# Altium PCB KV10BLDCControl.PcbDoc
Units mm, origin at the board's own origin, x right, y up, seen from the top; angles counter-clockwise.
Board outline 34.21 x 11.89 mm, 4 copper layers (Top Layer, GND, Signal Layer 1, Bottom Layer), stack 0.778 mm thick; 50 components, 52 nets, 240 pads, 164 vias.
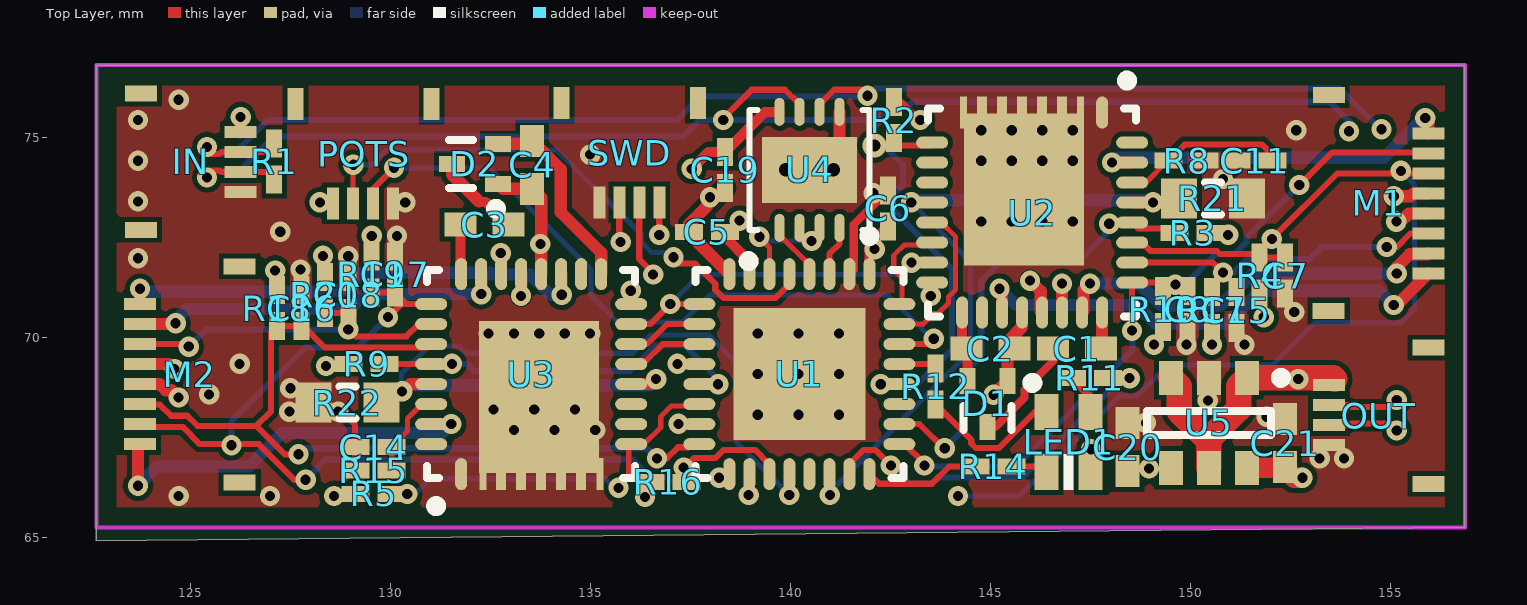
[diagram p0: Top Layer view]
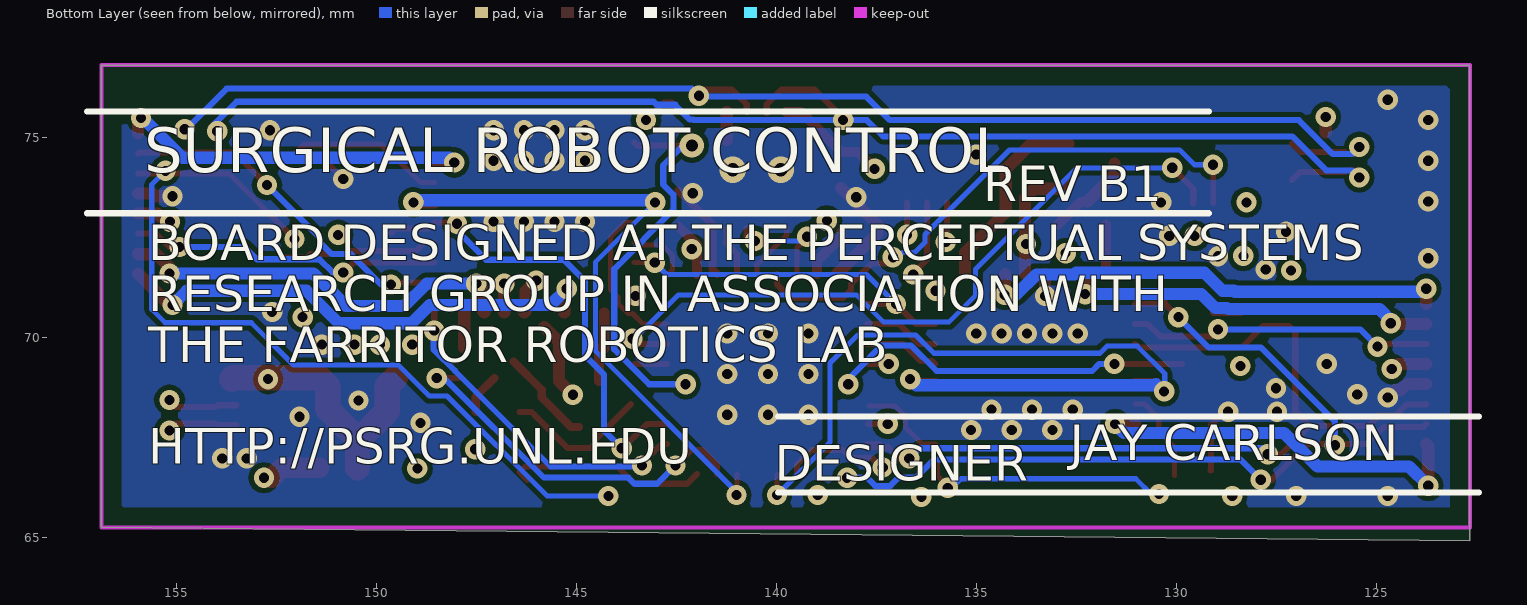
[diagram p1: Bottom Layer view, seen from below]
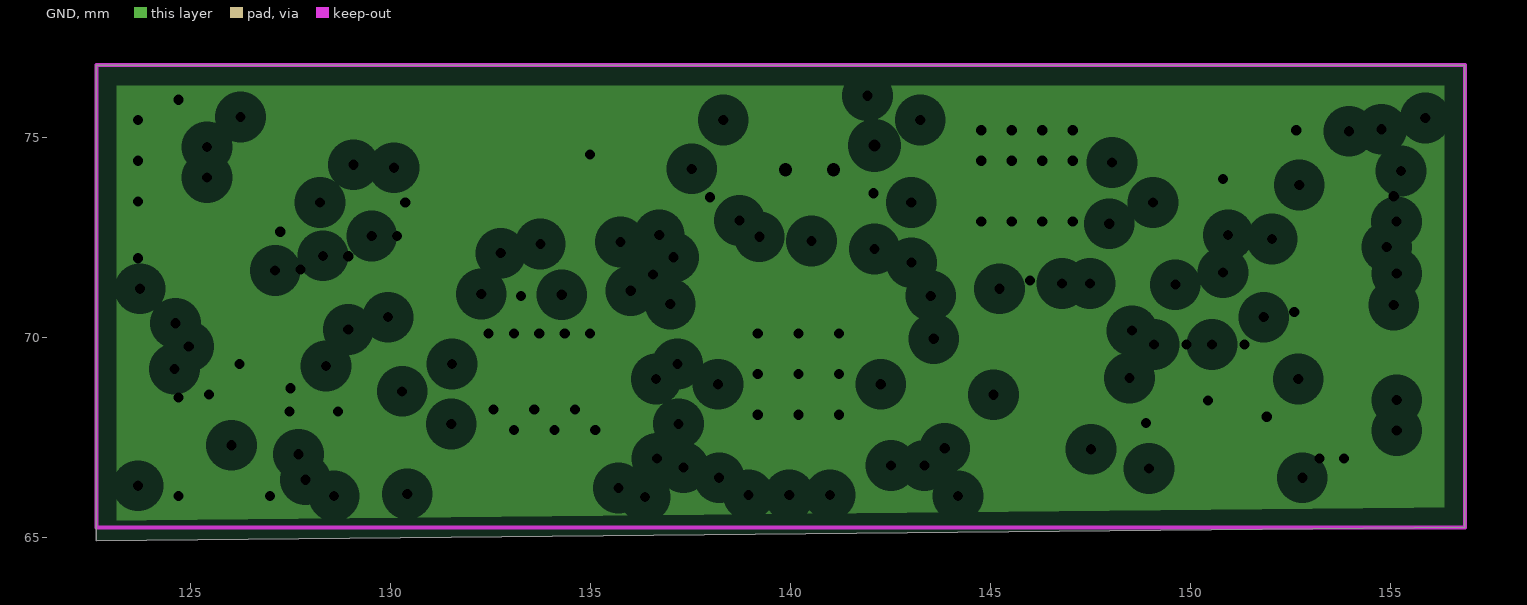
[diagram p2: GND, clearances drawn from the general rule]
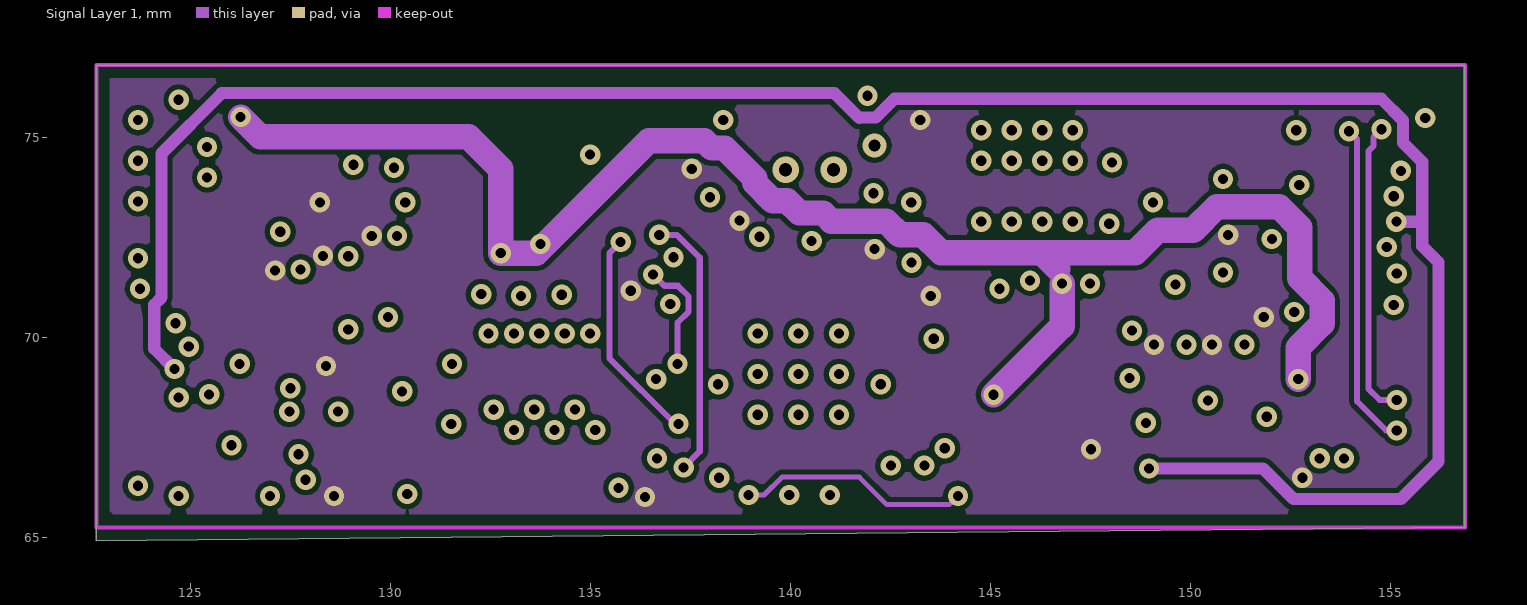
[diagram p3: Signal Layer 1]
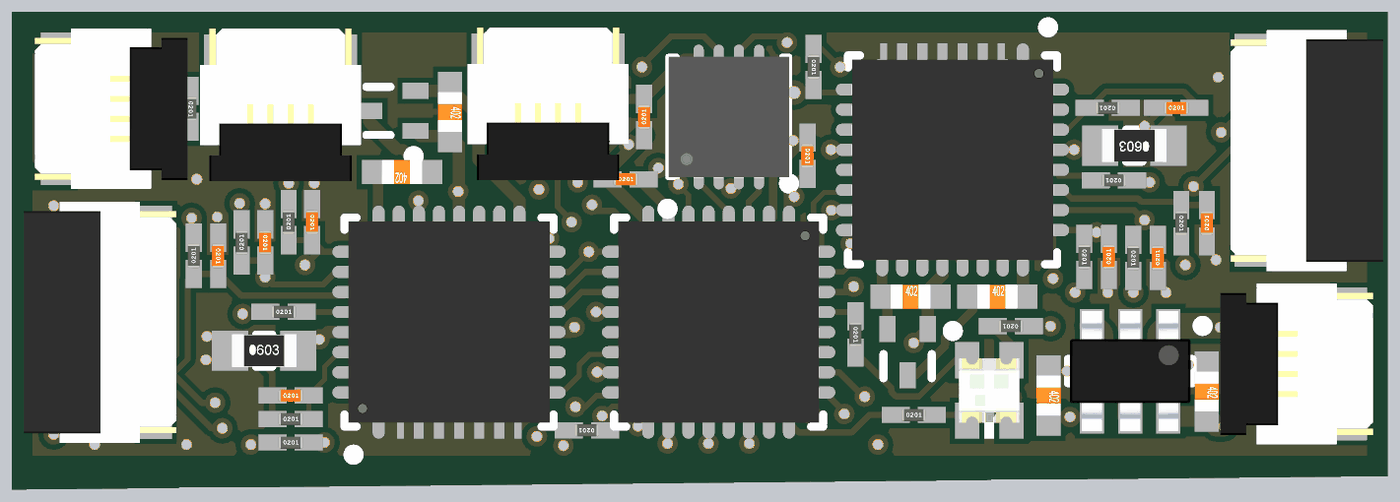
[diagram p4: 3D render of the assembled board from above, using the file's embedded part models]

## Layer stack, top to bottom
Top Solder: solder mask 0.0102, Solder Resist, Dk 3.5
Top Layer: signal copper 0.0356
Dielectric1: core 0.254, FR-4, Dk 4.2
GND: plane copper 0.036, net GND
Dielectric3: prepreg 0.127, Dk 4.2
Signal Layer 1: signal copper 0.036
Dielectric2: core 0.254, Dk 4.2
Bottom Layer: signal copper 0.0356
Bottom Solder: solder mask 0.0102, Solder Resist, Dk 3.5

## Board outline
122.657,76.81 156.87,76.81 156.87,65.253 122.657,64.919

## Design rules (kind name [scope] priority, off if disabled: settings)
Clearance [All] p1: gap=0.127
ComponentClearance [All] p1: gap=0 collisioncheckmode=3 verticalgap=0 showdistances=FALSE
DiffPairsRouting [All] p1: maxlimit=0.254 minlimit=0.254 mostfreqgap=0.254 toplayer_minwidth=0.127 toplayer_maxwidth=0.381 toplayer_prefwidth=0.381 midlayer1_minwidth=0.127 midlayer1_maxwidth=0.381 midlayer1_prefwidth=0.381 bottomlayer_minwidth=0.127 bottomlayer_maxwidth=0.381 bottomlayer_prefwidth=0.381 maxuncoupledlength=12.7
PlaneClearance [All] p1: clearance=0.508
PlaneConnect [All] p1: planeconnectstyle=Direct reliefexpansion=0.508 reliefentries=4 reliefconductorwidth=0.254 reliefairgap=0.254
PolygonConnect [All] p1: connectstyle=Direct reliefconductorwidth=0.254 reliefentries=4 polygonreliefangle="90 Angle" airgapwidth=0.254
RoutingVias [All] p1: holewidth=0.254 width=0.508 viastyle="Through Hole" minholewidth=0.254 minwidth=0.508 maxholewidth=0.711 maxwidth=1.27
SolderMaskExpansion [All] p1: expansion=0
Width [All] p1: maxlimit=5.08 minlimit=0.127 preferedwidth=0.127
25 further rules are at their usual default settings.

## Classes and differential pairs
differential pair COM: +COM_P -COM_N

## Components (designator, comment, footprint, x,y, rotation, side; value= is the part's Value field where it differs from the comment)
C1 "10n" CAPC1005N 147.168,69.723 r0 top
C2 "220n" CAPC1005N 145.009,69.723 r0 top
C3 "10n" CAPC1005N 132.359,72.822 r180 top
C4 "220n" CAPC1005N 133.553,74.32 r270 top
C5 "100n" CAPC0603N 137.922,72.644 r0 top
C6 "100n" CAPC0603N 142.443,73.228 r270 top
C7 "10n" CAPC0603N 152.375,71.552 r90 top
C8 "10n" CAPC0603N 149.936,70.714 r90 top
C11 "1n" CAPC0603N 151.613,74.422 r0 top
C14 "1n" CAPC0603N 129.591,67.259 r0 top
C15 "10n" CAPC0603N 151.155,70.688 r90 top
C16 "10n" CAPC0603N 127.787,70.739 r270 top
C17 "10n" CAPC0603N 130.124,71.577 r270 top
C18 "10n" CAPC0603N 128.956,71.069 r270 top
C19 "100n" CAPC0603N 138.379,74.193 r90 top
C20 "1u" CAPC1005N 148.438,67.259 r270 top
C21 "1u" CAPC1005N 152.375,67.361 r270 top
D1 "BAV99T" "SOT-523 (SC-75)" 144.932,67.767 r180 top
D2 "BAV99T" "SOT-523 (SC-75)" 131.547,74.346 r90 top
IN "FH34S-4S-0.5SH(50)" FH34S-4S-0.5SH(50) 126.263,73.635 r270 top
LED1 "HSMF-C114" HSMF-C114 146.914,67.386 r90 top
M1 "FH34S-8S-0.5SH(50)" FH34S-8S-0.5SH(50) 155.956,71.603 r270 top
M2 "FH34S-8S-0.5SH(50)" FH34S-8S-0.5SH(50) 123.749,70.841 r90 top
OUT "FH34S-4S-0.5SH(50)" FH34S-4S-0.5SH(50) 153.472,68.809 r90 top
POTS "FH34S-4S-0.5SH(50)" FH34S-4S-0.5SH(50) 128.575,73.355 r180 top
R1 "120R (DNI)" RESC0603N 127.102,74.397 r270 top
R2 "10k" RESC0603N 142.596,75.438 r270 top
R3 "10k" RESC0603N 150.063,72.619 r180 top
R4 "10k" RESC0603N 151.74,71.552 r270 top
R5 "10k" RESC0603N 129.591,66.091 r0 top
R8 "33k" RESC0603N 149.911,74.422 r180 top
R9 "10k" RESC0603N 129.413,69.342 r0 top
R10 "10k" RESC0603N 149.327,70.714 r270 top
R11 "100R" RESC0603N 147.498,68.986 r180 top
R12 "100R" RESC0603N 143.637,68.783 r270 top
R14 "100R" RESC0603N 145.085,66.777 r0 top
R15 "33k" RESC0603N 129.591,66.675 r0 top
R16 "10k" RESC0603N 136.957,66.396 r180 top
R17 "10k" RESC0603N 150.546,70.688 r270 top
R18 "10k" RESC0603N 127.178,70.739 r90 top
R19 "10k" RESC0603N 129.54,71.577 r90 top
R20 "10k" RESC0603N 128.372,71.069 r90 top
R21 "0R25 1%" RESC1608N 150.571,73.482 r180 top
R22 "0R25 1%" RESC1608N 128.93,68.377 r0 top
SWD "FH34S-4S-0.5SH(50)" FH34S-4S-0.5SH(50) 135.23,73.381 r180 top
U1 "MKV10Z32VFM7" QFN50P500X500-32V2N 140.233,69.088 r270 top
U2 "L6229Q" L6229Q 146.05,73.127 r270 top
U3 "L6229Q" L6229Q 133.528,69.088 r90 top
U4 "LTC2850CDD#PBF" DFN50P300X300X75-8N 140.487,74.193 r90 top
U5 "MIC5211-LXYM6 TR" SOT26A-6AN 150.47,67.869 r270 top

## Footprints (in the part's own frame and the unit in brackets; to place one, negate y for a bottom-side part, rotate by r counter-clockwise, add the part's x,y. Pads: shape width x height; smd on the part's side, far side on the other; paste and mask are expansions set on the pad)
CAPC0603N [mm] "Chip Capacitor (0201) Body 0.6x0.3mm, IPC Medium Density"
  rect 0.7x0.4 smd: 1(-0.45,0) 2(0.45,0)
  body extent -0.3,-0.15 0.3,0.15, height 0.3
CAPC1005N [mm] "Chip Capacitor (0402), Body 1.0x0.5mm, IPC Medium Density"
  rect 0.8x0.6 smd: 1(-0.6,0) 2(0.6,0)
  body extent -0.5,-0.3 0.5,0.3, height 0.2
DFN50P300X300X75-8N [mm]
  oval 0.7x0.25 smd: 1(-1.45,0.75) 2(-1.45,0.25) 3(-1.45,-0.25) 4(-1.45,-0.75) 5(1.45,-0.75) 6(1.45,-0.25) 7(1.45,0.25) 8(1.45,0.75)
  rect 1.65x2.38 smd: 9(0,0)
  silkscreen extent -2.41,-1.5 1.5,1.65, body extent -1.51,-1.5 1.51,1.5, height 0.8
FH34S-4S-0.5SH(50) [mm] "CONN FPC/FFC 4POS .5MM SMD GOLD"
  rect 0.4x0.8 smd: 0(-2.464,-2.489) 0(0.94,-2.49)
  rect 0.3x0.8 smd: 1(0,0) 2(-0.5,0) 3(-1,0) 4(-1.5,0)
  body extent -2.76,-3.04 1.24,0.76, height 0.94
FH34S-8S-0.5SH(50) [mm] "CONN FPC/FFC 11POS .5MM SMD GOLD"
  rect 0.4x0.8 smd: 0(-4.464,-2.489) 0(0.94,-2.49)
  rect 0.3x0.8 smd: 1(0,0) 2(-0.5,0) 3(-1,0) 4(-1.5,0) 5(-2,0) 6(-2.5,0) 7(-3,0) 8(-3.5,0)
  body extent -4.76,-3 1.24,0.8, height 1
HSMF-C114 [mm]
  rect 0.9x0.6 smd: 1(-0.75,-0.6) 2(-0.75,0.5) 3(0.75,0.5) 4(0.75,-0.6)
  silkscreen extent -1.2,-0.17 -0.3,0.08, body extent -0.8,-0.8 0.8,0.7, height 0.34
L6229Q [mm]
  oval 0.8x0.3 smd: 1(-2.5,1.75) 17(2.5,-1.75) 18(2.5,-1.25) 19(2.5,-0.75) 20(2.5,-0.25) 21(2.5,0.25) 22(2.5,0.75) 23(2.5,1.25) 24(2.5,1.75)
  rect 0.8x0.175 smd: 2(-2.5,1.21) 8(-2.5,-1.715)
  rect 0.8x0.25 smd: 3(-2.5,0.75) 4(-2.5,0.25) 5(-2.5,-0.25) 6(-2.5,-0.75) 7(-2.5,-1.25)
  oval 0.3x0.8 smd: 9(-1.75,-2.5) 10(-1.25,-2.5) 11(-0.75,-2.5) 12(-0.25,-2.5) 13(0.25,-2.5) 14(0.75,-2.5) 15(1.25,-2.5) 16(1.75,-2.5) 25(1.75,2.5) 26(1.25,2.5) 27(0.75,2.5) 28(0.25,2.5) 29(-0.25,2.5) 30(-0.75,2.5) 31(-1.25,2.5) 32(-1.75,2.5)
  rect 3.8x3 smd: 33(-0.575,-0.2)
  silkscreen extent -3.42,-2.6 2.6,2.6, body extent -2.51,-2.51 2.51,2.51, height 0.8
QFN50P500X500-32V2N [mm] "QFN, 32-Leads, Body 5x5mm, Pitch 0.5mm, IPC Medium Density"
  oval 0.8x0.3 smd: 1(-2.5,1.75) 2(-2.5,1.25) 3(-2.5,0.75) 4(-2.5,0.25) 5(-2.5,-0.25) 6(-2.5,-0.75) 7(-2.5,-1.25) 8(-2.5,-1.75) 17(2.5,-1.75) 18(2.5,-1.25) 19(2.5,-0.75) 20(2.5,-0.25) 21(2.5,0.25) 22(2.5,0.75) 23(2.5,1.25) 24(2.5,1.75)
  oval 0.3x0.8 smd: 9(-1.75,-2.5) 10(-1.25,-2.5) 11(-0.75,-2.5) 12(-0.25,-2.5) 13(0.25,-2.5) 14(0.75,-2.5) 15(1.25,-2.5) 16(1.75,-2.5) 25(1.75,2.5) 26(1.25,2.5) 27(0.75,2.5) 28(0.25,2.5) 29(-0.25,2.5) 30(-0.75,2.5) 31(-1.25,2.5) 32(-1.75,2.5)
  rect 3.3x3.3 smd: 33(0,0)
  silkscreen extent -3.57,-2.6 2.6,2.6, body extent -2.51,-2.51 2.51,2.51, height 0.8
RESC0603N [mm] "Chip Resistor, Body 0.6x0.3mm, IPC Medium Density"
  rect 0.7x0.4 smd: 1(-0.45,0) 2(0.45,0)
  body extent -0.3,-0.15 0.3,0.15, height 0.3
RESC1608N [mm] "Chip Resistor, Body 1.6x0.8mm, IPC Medium Density"
  rect 0.9x1 smd: 1(-0.85,0) 2(0.85,0)
  silkscreen extent -0.2,-0.4 0.2,0.4, body extent -0.8,-0.41 0.8,0.41, height 0.45
SOT26A-6AN [mm] "SOT23, 6-Leads, Body 2.9x1.6mm, Pitch 0.95mm, Lead Span 2.5mm, IPC Medium Density"
  rect 0.85x0.6 smd: 1(-1.125,0.95) 2(-1.125,0) 3(-1.125,-0.95) 4(1.125,-0.95) 5(1.125,0) 6(1.125,0.95)
  silkscreen extent -1.25,-1.55 0.3,1.93, body extent -1.5,-1.5 1.5,1.5, height 1.3
"SOT-523 (SC-75)" [mm] "3 LEAD SOT BODY SIZE: 1.6X0.8"
  rect 0.4x0.65 smd: 1(-0.5,-1.15) 2(0.5,-1.15) 3(0,0)
  silkscreen extent -1.25,-1.22 0.6,0.08, body extent -0.8,-1 0.8,-0.2, height 0.8

## Part data
C1 C2 C3 C4 C5 C6 C7 C8 C11 C14 C15 C16 C17 C18 C19 C20 C21: library part "Cap Semi", "Capacitor (Semiconductor SIM Model)"
D1 D2: "Silicon Switching Diode for High-Speed Switching"
IN OUT POTS SWD: "CONN FPC/FFC 4POS .5MM SMD GOLD"
LED1: "LED CHIP RGB 1.6X1.5X0.35MM SMD"
M1 M2: "CONN FPC/FFC 8POS .5MM SMD GOLD"
R1 R2 R3 R4 R5 R8 R9 R10 R11 R12 R14 R15 R16 R17 R18 R19 R20 R21 R22: library part "Res Semi", "Semiconductor Resistor"
U1: "Kinetis Cortex-M0+75 MHz Motor Control 32QFN"
U2 U3: "IC MOTOR DRIVER PAR 32VFQFPN"
U4: "IC TXRX RS485 20MBPS 8-DFN"
U5: "IC REG LDO 3.3V/5V 80MA SOT23-6"

## Via types
v1: diameter 0.508, hole 0.254, Top Layer to Bottom Layer, tented both sides, 161 vias
v2: diameter 0.66, hole 0.33, Top Layer to Bottom Layer, tented both sides, 2 vias
v3: diameter 0.61, hole 0.305, Top Layer to Bottom Layer, tented both sides, 1 vias

## Nets (pads, with @x,y where several pads share a name; then routed paths per layer and width w, separated by ;. In a path a pad name is that pad's centre, name@x,y a point inside that pad or via, vN(x,y) a via of type N, cw(c..) or ccw(c..) an arc to the next point about the centre after c; other vN are vias at no path point)
3V3: C5.2 C6.2 C19.2 C21.2 LED1.1 POTS.1 R2.1 R3.1 R4.2 R5.1 R9.1 R10.2 R16.2 R17.2 R18.2 R19.2 R20.2 U1.1 U1.7 U2.16 U3.16 U4.8 U5.6 | length 7.8
  Top Layer w0.127: R2.1 142.806,75.888 v1(143.256,75.438)
  Top Layer w0.254: v1(137.541,74.219) 137.966,74.643 C19.2 139.379,75.643 U4.8 ; C5.2 138.372,72.521 138.983,71.909 U1.7 ; U1.1 141.983,72.318 C6.2
  Top Layer w0.508: U5.6 152.358,66.744 152.604,66.497 v1(152.806,66.497)
  other v1: 136.373,66.015 128.6,66.04 147.523,67.208 128.397,69.291 149.098,69.825 150.546,69.825 151.841,70.51 143.515,71.044 136.017,71.171 127.127,71.679 128.321,72.043 142.113,72.212 129.54,72.542 150.952,72.568 138.735,72.923 128.245,73.381
5V: C20.2 M1.4 M2.4 U5.4 | length 57
  Top Layer w0.305: M2.4 v1@124.461,69.341 ; v1(155.157,72.898) 155.169,72.91 v1@155.169,73 ; v1@155.372,73 155.475,73.103 M1.4
  Signal Layer 1 w0.305: v1(124.612,69.215) 124.104,69.723 124.104,70.823 124.282,71.001 124.282,74.6 125.793,76.111 141.109,76.111 141.249,75.971 141.732,75.489 141.745,75.501 142.143,75.501 142.613,75.971 154.78,75.971 155.321,75.43 155.321,74.872 155.804,74.389 155.804,72.847 ; v1(148.971,66.726) 151.823,66.726 152.585,65.964 155.27,65.964 156.211,66.904 156.211,71.881 155.804,72.288 155.804,72.847 ; v1(155.157,72.898) 155.753,72.898 155.804,72.847
BLUE: R11.1 U1.23 | length 9.4
  Top Layer w0.152: U1.23 141.483,66.838 141.837,67.191 142.13,67.191 142.392,66.928 v1(142.519,66.802) ; R11.1 v1(148.488,68.986)
  Bottom Layer w0.152: v1(142.519,66.802) 142.977,66.345 143.547,66.345 143.699,66.497 145.806,66.497 148.295,68.986 v1(148.488,68.986)
COM_N: IN.2 OUT.3 R1.2 U4.7 | length 44.3
  Top Layer w0.152: v1(125.425,74.004) 125.425,74.105 125.501,74.181 125.734,74.181 125.781,74.135 IN.2 126.914,74.135 R1.2 ; v1(138.328,75.438) 138.303,75.463 139.036,76.197 139.873,76.197 140.237,75.833 U4.7 U4.7@140.237,75.618 ; OUT.3@153.492,67.809 153.975,67.809 154.022,67.855 155.016,67.855 155.169,67.703 v1(155.169,67.678)
  Signal Layer 1 w0.152: v1(153.975,75.159) 154.178,74.955 154.178,68.402 154.903,67.678 v1(155.169,67.678)
  Bottom Layer w0.152: v1(125.425,74.004) 125.603,74.181 126.254,74.181 127.104,75.032 137.328,75.032 137.735,75.438 v1(138.328,75.438) 142.062,75.438 142.075,75.451 142.164,75.451 142.519,75.806 142.519,75.82 142.991,75.82 143.067,75.895 153.492,75.895 154.026,75.362 154.026,75.209 v1(153.975,75.159)
COM_P: IN.3 OUT.2 R1.1 U4.6 | length 42.8
  Top Layer w0.152: v1@125.501,74.588 125.734,74.588 125.781,74.635 IN.3 126.89,74.635 R1.1 ; U4.6 140.737,75.833 141.101,76.197 141.761,76.197 141.922,76.035 v1(141.935,76.048) ; OUT.2@153.492,68.309 153.975,68.309 154.022,68.262 v1@155.016,68.262
  Signal Layer 1 w0.152: v1(154.788,75.209) 154.584,75.006 154.584,74.787 154.46,74.662 154.46,68.721 154.741,68.44 v1(155.169,68.44)
  Bottom Layer w0.152: v1(125.425,74.766) 125.603,74.588 126.086,74.588 126.936,75.438 137.16,75.438 137.744,76.022 141.91,76.022 142.113,76.225 153.737,76.225 154.753,75.209 v1(154.788,75.209)
GND: C5.1 C6.1 C7.1 C8.1 C11.1 C14.1 C15.1 C16.1 C17.1 C18.1 C19.1 C20.1 C21.1 IN.1 M1.5 M2.5 OUT.4 POTS.4 R8.1 R15.1 R21.1 R22.1 SWD.1 U1.2 U1.8 U1.33 U2.1 U2.2 U2.3 U2.4 U2.5 U2.6 U2.7 U2.8 U2.21 U2.33 U3.1 U3.2 U3.3 U3.4 U3.5 U3.6 U3.7 U3.8 U3.21 U3.33 U4.5 U4.9 U5.2 | length 12
  Top Layer w0.152: v1(128.702,68.148) 128.803,68.148 129.127,67.824 129.127,66.689 R15.1 ; v1(150.825,73.965) 151.282,74.422 C11.1@151.366,74.422
  Top Layer w0.203: U1.2 141.591,71.696 141.591,72.826 C6.1
  Top Layer w0.305: M2.5 124.232,68.841 124.391,68.682 124.536,68.682 v1(124.714,68.504) ; v1(133.274,71.044) 133.278,71.048 U3.21 ; C5.1@137.472,72.599 U1.8 ; C5.1 137.472,72.836 C19.1 ; U4.9@141.237,74.943 U4.5 ; v1(145.999,71.425) 146.267,71.157 146.267,70.66 U2.21 ; v1(155.092,73.533) 155.295,73.533 155.296,73.534 155.518,73.534 155.586,73.603 M1.5
  other v1: 124.714,66.04 127,66.04 153.238,66.98 153.848,66.98 133.096,67.691 134.112,67.691 135.128,67.691 148.895,67.869 151.917,68.021 139.192,68.072 140.208,68.072 141.224,68.072 127.483,68.148 132.588,68.199 133.604,68.199 134.62,68.199 150.444,68.428 125.476,68.58 127.508,68.732 139.192,69.088 140.208,69.088 141.224,69.088 126.238,69.342 149.911,69.825 151.359,69.825 132.461,70.104 133.096,70.104 133.731,70.104 134.366,70.104 135.001,70.104 139.192,70.104 140.208,70.104 141.224,70.104 152.603,70.637 127.762,71.704 123.698,71.984 128.956,72.034 130.175,72.542 127.254,72.644 144.78,72.898 145.542,72.898 146.304,72.898 147.066,72.898 130.378,73.381 123.698,73.406 137.998,73.508 142.088,73.609 123.698,74.422 144.78,74.422 145.542,74.422 146.304,74.422 147.066,74.422 135.001,74.574 144.78,75.184 145.542,75.184 146.304,75.184 147.066,75.184 152.654,75.184 123.698,75.438 124.714,75.946
  other v2: 139.887,74.193 141.087,74.193
GREEN: R12.1 U1.29 | length 0.8
  Top Layer w0.152: U1.29 R12.1@143.532,69.338
M1_ADC: R21.2 U1.22 U2.12 U2.29 | length 17.8
  Top Layer w0.127: U1.22 140.983,66.077 v1(140.995,66.065)
  Top Layer w0.305: U2.29 149.069,73.377 v1(149.073,73.381)
  Signal Layer 1 w0.127: v1(140.995,66.065) v1@140.995,66.142
  Bottom Layer w0.127: v1(140.995,66.065) 140.995,66.142 144.513,69.659 144.513,71.895 v1(143.027,73.381) ; 147.885,73.381 v1(149.073,73.381)
  Bottom Layer w0.305: v1(143.027,73.381) 143.078,73.431 149.022,73.431 v1(149.073,73.381)
M1_DIAG: R3.2 U1.26 U2.28 | length 11.5
  Top Layer w0.152: U1.26 143.236,67.838 143.866,67.208 v1(143.866,67.234) ; v1(147.98,72.847) 148.01,72.877 U2.28 ; U2.28@148.697,72.73 149.502,72.73 R3.2
  Signal Layer 1 w0.152: v1@147.955,72.822 v1(147.98,72.847)
  Bottom Layer w0.152: v1(143.866,67.234) 144.303,67.671 144.303,69.072 144.78,69.549 144.78,71.411 145.315,71.945 147.253,71.945 147.98,72.673 v1(147.98,72.847)
M1_DIR: U1.31 U2.13 | length 3.9
  Top Layer w0.127: U1.31 143.319,70.338 ; 143.324,70.333 143.591,70.599 143.699,70.599 143.96,70.86 143.96,71.018 144.141,71.199 144.141,72.518 143.782,72.877 U2.13
M1_EN: U1.32 U2.14 | length 2.4
  Top Layer w0.127: U1.32 142.799,70.903 142.799,71.482 142.592,71.689 142.592,72.057 142.852,72.318 143.491,72.318 U2.14
M1_HALL1: C7.2 M1.6 R4.1 U1.18 U2.27 | length 31.3
  Top Layer w0.152: U2.27 148.8,72.377 149.015,72.161 150.673,72.161 150.749,72.085 151.656,72.085 R4.1 C7.2 ; v1(152.044,72.466) 153.681,74.103 M1.6
  Signal Layer 1 w0.127: v1(138.963,66.065) 139.351,66.065 139.795,66.51 141.732,66.51 142.419,65.823 143.979,65.823 v1(144.196,66.04)
  Bottom Layer w0.127: v1(144.196,66.04) 145.726,66.04 148.228,68.542 148.673,68.542 149.447,69.317 152.07,69.317 153.124,70.371 155.277,70.371 155.613,70.707 155.613,73.825 v1(155.27,74.168)
M1_HALL2: C8.2 M1.7 R10.1 U1.25 U2.25 | length 17.9
  Top Layer w0.152: U1.25 142.872,67.338 143.358,66.853 v1(143.358,66.802) ; v1(148.549,70.173) 148.549,71.375 U2.25 v1@149.723,71.377 ; v1(152.73,73.812) 153.543,74.625 155.933,74.625 M1.7
  Bottom Layer w0.152: v1(143.358,66.802) 143.383,66.777 145.644,66.777 148.031,69.164 148.031,69.176 148.299,69.444 148.311,69.444 148.565,69.698 148.565,70.157 v1(148.549,70.173) ; v1(149.631,71.323) 149.874,71.323 150.636,72.085 151.116,72.085 151.409,72.378 151.409,72.492 v1(152.73,73.812)
M1_HALL3: C15.2 M1.3 R17.1 U2.26 | length 7.9
  Top Layer w0.152: U2.26 150.562,71.877 150.722,71.717 v1@150.825,71.717 ; v1(154.917,72.263) 155.168,72.263 155.508,72.603 M1.3
  Bottom Layer w0.152: v1(150.825,71.628) 151.091,71.628 151.421,71.958 152.984,71.958 153.289,72.263 v1(154.917,72.263)
M1_OUT1: M1.8 U2.31 | length 9.2
  Top Layer w0.305: v1(148.049,74.377) U2.31 ; v1(155.88,75.489) 155.956,75.413 M1.8
  Bottom Layer w0.305: v1(148.049,74.377) 148.171,74.498 154.846,74.498 155.837,75.489 v1(155.88,75.489)
M1_OUT2: M1.2 U2.23 | length 10.1
  Top Layer w0.305: U2.23 147.333,70.66 147.333,71.184 v1(147.498,71.349) ; v1(155.169,71.603) 155.169,71.76 155.493,72.085 155.939,72.085 M1.2
  Bottom Layer w0.305: v1(147.498,71.349) 148.738,71.349 149.297,70.79 150.756,70.79 151.568,71.603 v1(155.169,71.603)
M1_OUT3: M1.1 U2.19 | length 12.5
  Top Layer w0.305: v1(145.237,71.222) 145.3,71.159 U2.19 ; v1(155.092,70.815) 155.169,70.815 M1.1
  Bottom Layer w0.305: v1(145.237,71.222) 145.644,70.815 148.661,70.815 149.118,70.358 150.934,70.358 151.747,71.171 154.737,71.171 v1(155.092,70.815)
M1_TACHO: R2.2 U1.28 U2.9 | length 9.9
  Top Layer w0.152: v3(142.109,74.803) 143.476,74.803 U2.9
  Bottom Layer w0.152: v3(142.109,74.803) 142.328,74.803 142.824,74.307 142.824,73.824 142.57,73.57 142.57,73.191 144.049,71.713 144.049,69.703 143.18,68.834 v1(142.265,68.834)
M2_ADC: R22.2 U1.20 U3.12 U3.29 | length 21.8
  Top Layer w0.127: v1(139.979,66.065) 139.983,66.069 U1.20
  Top Layer w0.305: v1(130.302,68.656) 130.327,68.656 130.509,68.838 U3.29 ; U3.12 136.529,68.838 v1(136.652,68.961)
  Signal Layer 1 w0.127: v1(139.979,66.065) v1@140.005,66.091
  Bottom Layer w0.127: v1(130.302,68.656) 130.287,68.671 130.287,69.101 130.973,69.787 131.731,69.787 131.909,69.609 136.059,69.609 136.516,70.066 137.96,70.066 138.659,69.367 138.659,67.386 v1(139.979,66.065)
  Bottom Layer w0.305: 130.509,68.838 130.539,68.809 136.5,68.809 v1(136.652,68.961)
M2_DIAG: R9.2 U1.13 U3.28 | length 9.1
  Top Layer w0.152: R9.2 129.867,69.338 U3.28 131.543,69.338 v1(131.547,69.342)
  Signal Layer 1 w0.152: v1@131.496,69.342 v1(131.547,69.342)
  Bottom Layer w0.152: v1(131.547,69.342) 131.928,69.342 132.105,69.164 135.992,69.164 136.627,69.799 137.389,69.799 137.389,69.785 137.643,69.531 137.643,69.52 v1@138.201,68.961
  other v1: 138.201,68.834
M2_DIR: U1.11 U3.13 | length 1.9
  Top Layer w0.152: U3.13 136.108,69.418 136.398,69.418 136.818,69.838 U1.11
M2_EN: U1.10 U3.14 | length 1.9
  Top Layer w0.152: U3.14 136.423,69.838 136.923,70.338 U1.10
M2_HALL1: C16.2 M2.6 R18.1 U1.16 U3.27 | length 21.9
  Top Layer w0.152: M2.6 123.763,68.326 124.245,68.326 124.525,68.047 124.931,68.047 125.185,67.793 126.659,67.793 ; R18.1 127.025,70.137 127.025,68.159 126.659,67.793 ; R18.1@127.229,70.289 127.23,70.29 127.826,70.29 128.368,69.748 130.938,69.748 U3.27 ; v1(127.711,67.081) 127.37,67.081 126.659,67.793 ; v1(136.673,66.98) 136.92,66.98 137.199,67.259 137.451,67.259 137.456,67.264 137.66,67.264 U1.16 U1.16@137.417,67.338
  Bottom Layer w0.152: v1(127.711,67.081) 127.864,67.234 136.419,67.234 v1(136.673,66.98)
M2_HALL2: C17.2 M2.7 R19.1 U1.17 U3.25 | length 23.4
  Top Layer w0.152: M2.7 123.822,67.767 124.816,67.767 125.247,67.335 126.721,67.335 127.61,66.446 v1(127.889,66.446) ; R19.1 C17.2 130.413,70.838 ; v1(129.946,70.51) 130.274,70.838 130.413,70.838 ; U3.25 130.413,70.838
  Bottom Layer w0.152: v1(126.035,67.31) 126.035,67.906 127.877,69.748 129.184,69.748 v1(129.946,70.51) ; v1(127.889,66.446) 128.397,66.954 136.052,66.954 136.509,66.497 136.945,66.497 137.148,66.294 137.527,66.294 137.73,66.497 v1(138.227,66.497)
M2_HALL3: C18.2 M2.3 R20.1 U3.26 | length 8.5
  Top Layer w0.152: M2.3 124.901,69.841 v1(124.968,69.774) ; R20.1 C18.2@129.081,70.619 ; v1(128.956,70.206) 129.134,70.028 130.404,70.028 130.714,70.338 U3.26
  Signal Layer 1 w0.152: v1@124.917,69.825 v1(124.968,69.774)
  Bottom Layer w0.152: v1(124.968,69.774) 125.4,70.206 v1(128.956,70.206)
M2_OUT1: M2.8 U3.31 | length 10
  Top Layer w0.305: v1(123.698,66.294) 123.698,67.29 M2.8 ; U3.31 v1(131.529,67.838)
  Bottom Layer w0.305: v1(123.698,66.294) 124.181,66.777 126.467,66.777 127.305,67.615 131.306,67.615 v1(131.529,67.838)
M2_OUT2: M2.2 U3.23 | length 9.4
  Top Layer w0.305: M2.2 124.62,70.341 v1(124.638,70.358) ; v1(132.278,71.087) U3.23
  Signal Layer 1 w0.305: v1@132.265,71.087 v1(132.278,71.087)
  Bottom Layer w0.305: v1@124.6,70.396 124.917,70.714 128.709,70.714 128.735,70.739 129.025,70.739 129.373,71.087 v1(132.278,71.087)
M2_OUT3: M2.1 U3.19 | length 11.9
  Top Layer w0.305: M2.1 v1(123.749,71.222) ; U3.19 134.278,71.081 v1(134.29,71.069)
  Signal Layer 1 w0.305: v1(134.29,71.069) v1@134.29,71.095
  Bottom Layer w0.305: v1(123.749,71.222) 123.825,71.145 128.531,71.145 128.556,71.171 128.847,71.171 129.296,71.62 132.499,71.62 132.542,71.577 133.495,71.577 134.003,71.069 v1(134.29,71.069)
M2_TACHO: R5.2 U1.14 U3.9 | length 9
  Top Layer w0.127: v1(135.712,66.243) 135.687,66.269 135.966,66.548 135.966,67.276 U3.9 136.35,67.338 136.766,67.754 136.766,68.028 137.027,68.288 U1.14@137.683,68.288
  Bottom Layer w0.127: v1(130.429,66.091) 130.632,66.091 131.013,66.472 135.382,66.472 135.611,66.243 v1(135.712,66.243)
NetC1_1: C1.1 D1.3 | length 2.4
  Top Layer w0.203: D1.3 145.131,67.767 145.861,68.498 145.861,68.696 146.568,69.402
NetC1_2: C1.2 U2.24 | length 0.9
  Top Layer w0.305: C1.2@147.8,69.755 U2.24
NetC2_1: C2.1 D1.2 U2.17 | length 1.7
  Top Layer w0.254: C2.1@144.3,69.723 U2.17 ; C2.1 144.432,69.699 D1.2
NetC3_1: C3.1 D2.3 | length 2.2
  Top Layer w0.254: 132.221,73.401 132.23,73.392 132.389,73.392 C3.1
  Top Layer w0.305: D2.3 131.547,74.076 132.221,73.401
NetC3_2: C3.2 U3.24 | length 1.2
  Top Layer w0.254: C3.2 131.759,71.606 U3.24
NetC4_1: C4.1 D2.2 U3.17 | length 4.9
  Top Layer w0.305: D2.2 133.628,74.846 134.264,74.209 134.264,73.134 135.278,72.121 U3.17
NetC11_2: C11.2 R8.2 U2.30 | length 4.3
  Top Layer w0.127: U2.30 148.896,73.877 R8.2@149.442,74.422
  Top Layer w0.152: R8.2 149.864,74.825 151.8,74.825 152.203,74.422 C11.2@152.266,74.422
NetC14_2: C14.2 R15.2 U3.30 | length 2.3
  Top Layer w0.127: R15.2@130.041,66.548 C14.2 130.437,67.656 130.437,67.979 130.796,68.338 U3.30
NetLED1_2: LED1.2 R14.2 | length 1.2
  Top Layer w0.152: R14.2 146.273,66.777 LED1.2 LED1.2@146.224,66.446
NetLED1_3: LED1.3 R12.2 | length 3.7
  Top Layer w0.152: R12.2 144.529,67.441 144.529,67.358 144.648,67.239 145.217,67.239 146.114,68.136 LED1.3
NetLED1_4: LED1.4 R11.2 | length 1
  Top Layer w0.203: R11.2 147.514,68.521 LED1.4
POT1: POTS.2 U1.5 | length 14.1
  Top Layer w0.127: POTS.2 129.075,74.312 v1(129.083,74.32)
  Top Layer w0.152: v1(137.084,72.009) 137.058,71.984 137.185,71.857 137.617,71.857 138.13,71.344 138.13,71.192 138.337,70.985 139.63,70.985 139.983,71.339 U1.5
  Bottom Layer w0.127: v1(129.083,74.32) 129.546,74.32 129.915,74.689 134.169,74.689 136.284,72.574 136.284,72.384 136.544,72.123 136.843,72.123 v1@136.957,72.009
POT2: POTS.3 U1.30 | length 18.2
  Top Layer w0.152: POTS.3 129.575,73.72 v1(130.099,74.244) ; U1.30 143.447,69.838 143.586,69.977 v1(143.592,69.972)
  Bottom Layer w0.127: v1(130.099,74.244) 132.48,74.244 135.023,71.701 135.023,71.047 135.677,70.393 137.322,70.393 137.998,71.069 142.443,71.069 v1@143.541,69.972
PTC6: U1.27
RED: R14.1 U1.24 | length 2.9
  Top Layer w0.152: U1.24 142.227,66.345 143.547,66.345 143.979,66.777 R14.1
RESET: R16.1 SWD.4 U1.19 | length 10.2
  Top Layer w0.152: v1(136.728,72.568) 136.728,73.379 SWD.4 ; v1(137.338,66.751) 137.363,66.751 137.597,66.985 138.13,66.985 138.336,67.191 139.13,67.191 139.483,66.838 U1.19
  Signal Layer 1 w0.152: v1(136.728,72.568) 137.172,72.568 137.742,71.998 137.742,67.155 v1(137.338,66.751)
RX: U1.4 U4.1 | length 1.5
  Top Layer w0.127: U4.1 139.737,72.566 140.483,71.82 U1.4 ; U1.4@140.49,71.82 U1.4@140.509,71.82
SWCLK: SWD.3 U1.12 | length 5.4
  Top Layer w0.152: SWD.3 136.23,71.96 136.576,71.614 v1(136.576,71.577) ; v1(137.185,69.342) 137.189,69.338 U1.12@137.708,69.338
  Signal Layer 1 w0.152: v1(136.576,71.577) 136.858,71.295 137.194,71.295 137.462,71.027 137.462,70.649 137.185,70.372 v1(137.185,69.342)
SWDIO: SWD.2 U1.15 | length 6.9
  Top Layer w0.152: SWD.2 135.73,72.423 v1(135.763,72.39) ; v1(137.211,67.843) 137.216,67.838 U1.15@137.708,67.838
  Signal Layer 1 w0.152: v1(135.763,72.39) 135.484,72.111 135.484,69.483 137.123,67.843 v1(137.211,67.843)
TX: U1.3 U4.4 | length 1.2
  Top Layer w0.152: U1.3 140.983,72.092 141.237,72.346 U4.4@141.237,72.718
TXEN: U1.6 U4.2 U4.3 | length 2.7
  Top Layer w0.127: v1(139.231,72.522) 139.268,72.485 139.268,72.466 139.483,72.251 U1.6
  Top Layer w0.152: U4.3@140.737,72.513 U4.3
  Signal Layer 1 w0.127: v1(139.231,72.522) v1@139.231,72.579
  Bottom Layer w0.127: v1(139.231,72.522) 139.338,72.415 v1(140.538,72.415)
VM: C2.2 C4.2 D1.1 D2.1 IN.4 OUT.1 U2.20 U2.22 U3.20 U3.22 U5.1 U5.3 U5.5 | length 53.6
  Top Layer w0.305: IN.4 v1(126.263,75.514) ; D2.1 132.822,73.72 C4.2 133.778,73.496 U3.20 ; v1(145.085,68.57) D1.1 145.432,69.894 U2.20@145.8,70.262 ; U2.22 v1(146.8,71.349)
  Top Layer w0.635: U5.3 149.725,68.788 149.725,68.159 150.47,67.414 ; U5.5 150.47,67.414 ; 153.619,68.961 153.586,68.994 U5.1 151.214,68.788 151.214,68.21 150.47,67.465 150.47,67.414
  Signal Layer 1 w0.635: v1(126.263,75.514) 126.759,75.019 131.966,75.019 132.766,74.219 v1(132.766,72.111) 133.658,72.111 136.464,74.917 137.861,74.917 138.039,74.739 138.364,74.739 139.113,73.99 139.113,73.873 139.567,73.419 139.928,73.419 140.233,73.114 140.828,73.114 141.031,72.911 142.402,72.911 142.742,72.572 143.326,72.572 143.774,72.123 146.289,72.123 ; v1(145.085,68.57) 146.8,70.285 v1(146.8,71.349) ; 146.698,71.714 146.289,72.123 ; v1(152.705,68.961) 152.705,69.751 153.302,70.348 153.302,70.927 152.743,71.486 152.743,72.756 152.232,73.266 150.663,73.266 150.079,72.682 149.187,72.682 148.628,72.123 146.289,72.123
  other v1: 133.756,72.339
VREF: U1.9 U2.15 U3.15 | length 8.9
  Top Layer w0.127: v1(143.036,71.873) 143.04,71.877 U2.15
  Top Layer w0.152: U3.15 136.505,70.338 v1(137.005,70.838) U1.9
  Bottom Layer w0.127: v1(137.005,70.838) 137.744,71.577 142.741,71.577 v1(143.036,71.873)
pads on no net: IN.0 M1.0 M2.0 OUT.0 POTS.0 SWD.0 U1.21 U2.10 U2.11 U2.18 U2.32 U3.10 U3.11 U3.18 U3.32

## Polygon pours and split planes (outlines as drawn)
3V3 on Signal Layer 1 "3V3" (solid, remove dead copper, pour order 4): 156.54,65.583 156.54,76.479 122.987,76.479 122.987,65.583
GND on Top Layer "GND" (solid, pour order 2): 123.165,76.3 123.165,65.761 156.362,65.761 156.362,76.401 156.36,76.403 156.362,76.401 156.362,76.3
GND on Bottom Layer "GND" (solid, remove dead copper, pour order 6): 123.165,76.302 156.362,76.302 156.362,65.801 156.314,65.761 123.165,65.761
GND on GND (split plane): 156.36,65.758 123.167,65.435 123.167,76.299 156.36,76.299

## Keep-outs
Keep-Out Layer:
  lines w0.1: 122.657,65.253 122.657,76.81 156.87,76.81 156.87,65.253 122.657,65.253

## Silkscreen, mask and mechanical layers (free items; w line width, h text height)
Bottom Overlay:
  lines w0.152: 122.428,66.123 139.956,66.123 ; 122.428,68.028 139.956,68.028 ; 129.186,73.108 157.226,73.108 ; 129.186,75.648 157.226,75.648
  text "SURGICAL ROBOT CONTROL" at 155.806,73.768 h1.91
  text "REV B1" at 134.825,73.108 h1.52
  text "BOARD DESIGNED AT THE PERCEPTUAL SYSTEMS" at 155.702,71.628 h1.52
  text "RESEARCH GROUP IN ASSOCIATION WITH" at 155.702,70.358 h1.52
  text "THE FARRITOR ROBOTICS LAB" at 155.702,69.088 h1.52
  text "JAY CARLSON" at 132.666,66.631 h1.52
  text "HTTP://PSRG.UNL.EDU" at 155.702,66.548 h1.52
  text "DESIGNER" at 140.032,66.123 h1.52